# Allegro board 09-24.brd
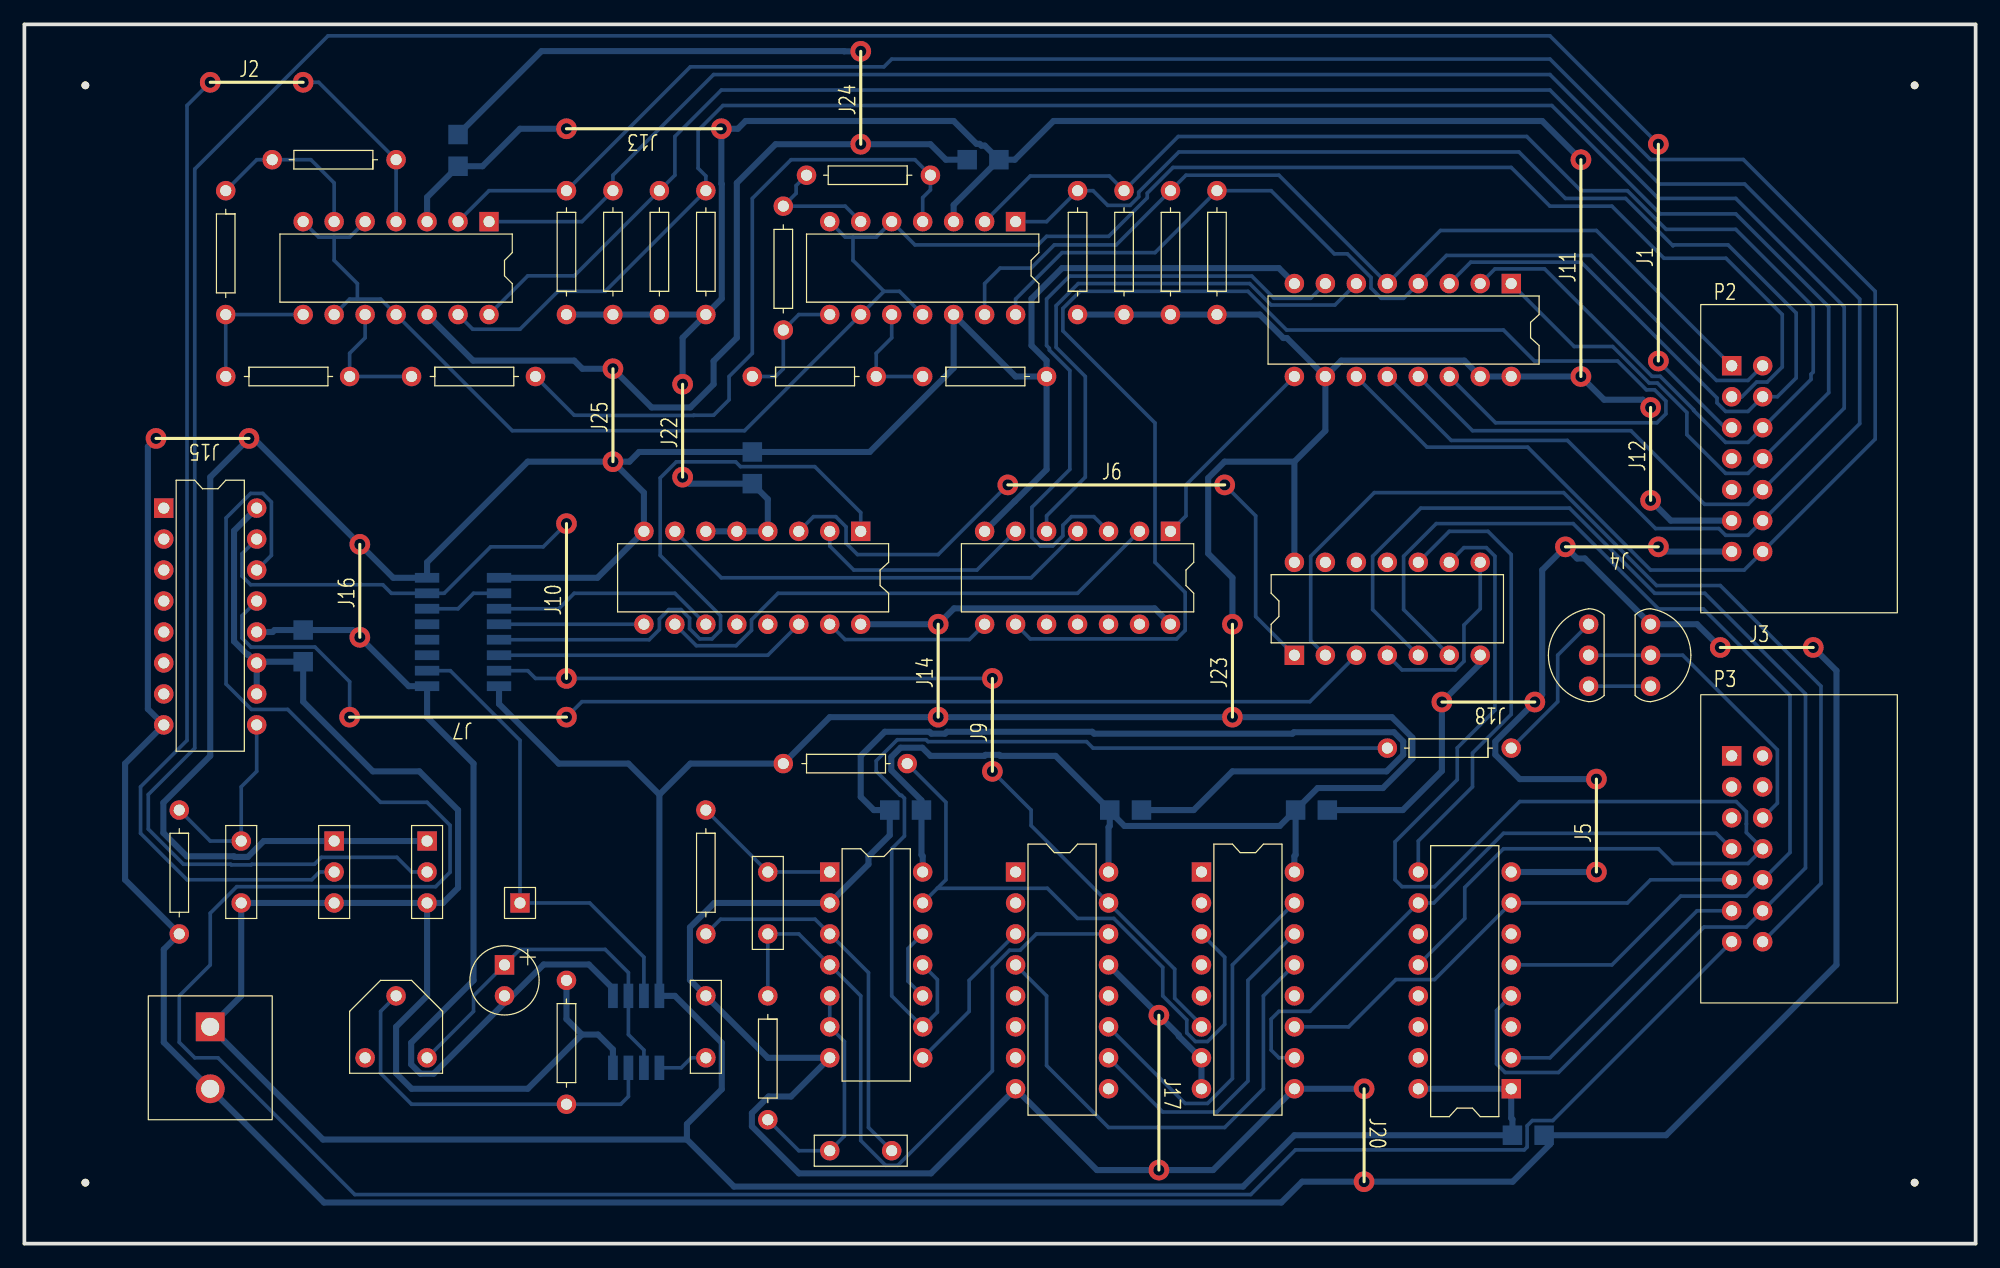
[diagram p0: board, top side]
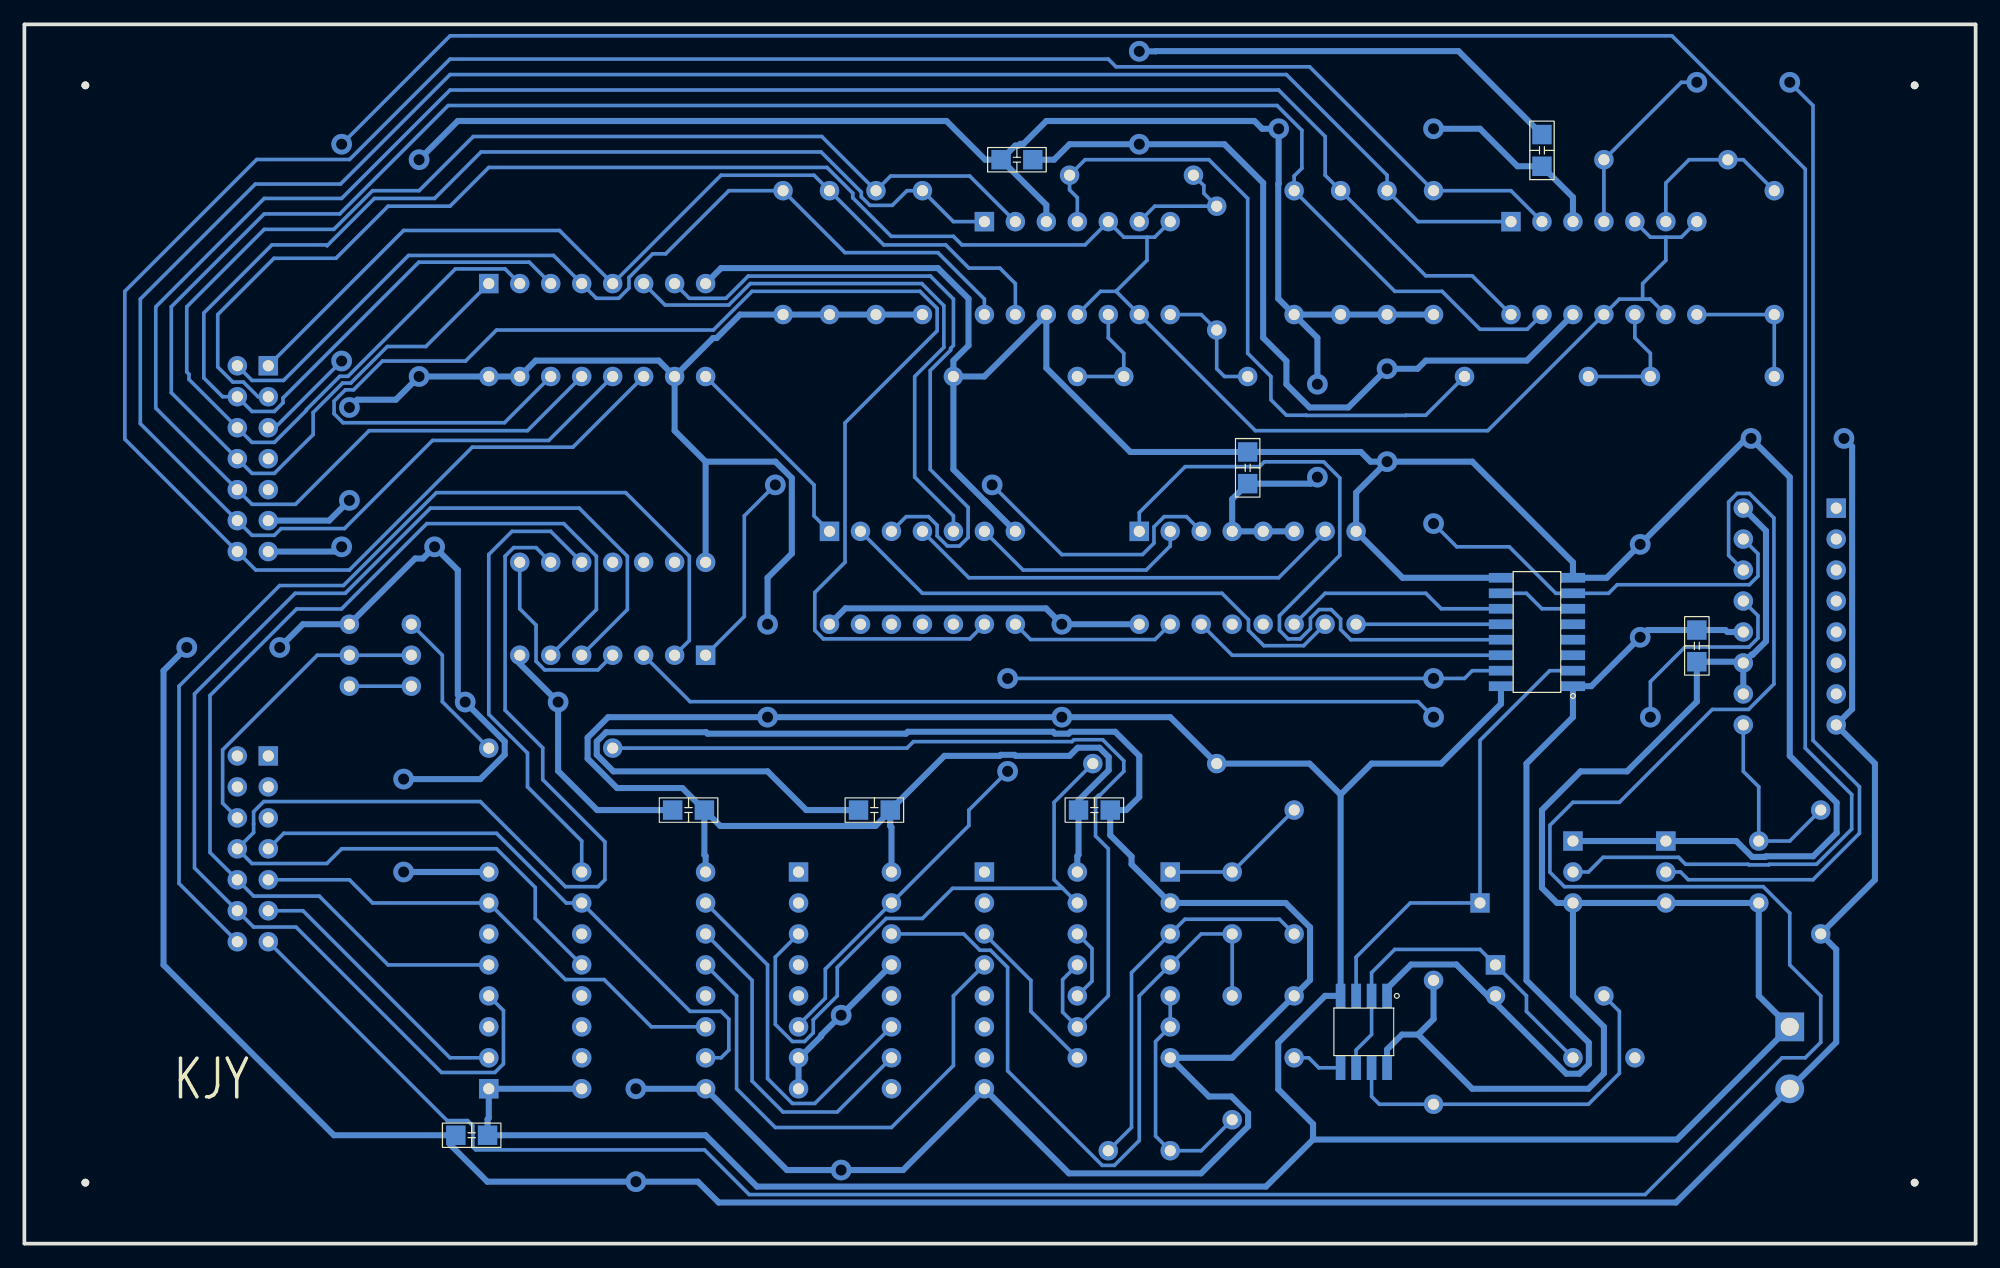
[diagram p1: board, bottom side, seen from below]

Outline 160 x 100 mm; copper layers: TOP, BOTTOM. Coordinates in mm from the lower left corner of the outline.
Outline path: 0,100 0,0 160,0 160,100 0,100

## Design rules (mm)
nets with their own width: min track width 0.5; nets +5V GND

## Placement (name value [footprint] x y rotation side)
C1  10uF  [CAP196]  39.37 22.86 0 top
C2  0.1uF  [CAP300]  55.88 15.24 90 top
C3  0.1uF  [CAP300]  17.78 27.94 90 top
C4  0.01uF  [CAP300]  60.96 30.48 270 top
C5  0.01uF  [CAP300]  71.12 7.62 180 top
C6  0.1uF  [SMDCAP]  35.56 88.27 90 bottom
C7  0.1uF  [SMDCAP]  80.01 88.9 180 bottom
C8  0.1uF  [SMDCAP]  59.69 62.23 90 bottom
C9  0.1uF  [SMDCAP]  22.86 47.62 90 bottom
C10  0.1uF  [SMDCAP]  73.66 35.56 180 bottom
C11  0.1uF  [SMDCAP]  88.9 35.56 0 bottom
C12  0.1uF  [SMDCAP]  104.14 35.56 0 bottom
C13  0.1uF  [SMDCAP]  121.92 8.89 0 bottom
J1  -  [JUMPER6]  133.99 72.39 270 bottom
J2  -  [JUMPER2]  15.24 95.25 180 bottom
J3  -  [JUMPER2]  139.06 48.9 180 bottom
J4  -  [JUMPER2]  133.99 57.15 0 bottom
J5  -  [JUMPER2]  128.91 30.48 270 bottom
J6  -  [JUMPER6]  80.64 62.23 180 bottom
J7  -  [JUMPER6]  44.45 43.18 0 bottom
J9  -  [JUMPER2]  79.38 38.73 270 bottom
J10  -  [JUMPER4]  44.45 46.35 270 bottom
J11  -  [JUMPER6]  127.64 71.12 270 bottom
J12  -  [JUMPER2]  133.35 60.96 270 bottom
J13  -  [JUMPER4]  57.15 91.44 0 bottom
J14  -  [JUMPER2]  74.93 43.18 270 bottom
J15  -  [JUMPER2]  18.41 66.04 0 bottom
J16  -  [JUMPER2]  27.5 49.73 270 bottom
J17  -  [JUMPER4]  93.03 18.73 90 bottom
J18  -  [JUMPER2]  123.86 44.42 0 bottom
J20  -  [JUMPER2]  109.86 12.7 90 bottom
J22  -  [JUMPER2]  53.98 62.87 270 bottom
J23  -  [JUMPER2]  99.06 43.18 270 bottom
J24  -  [JUMPER2]  68.58 90.17 270 bottom
J25  -  [JUMPER2]  48.26 64.14 270 bottom
NOREF  -  [unnamed]  5 95 0 top
NOREF#2  -  [unnamed]  155 5 0 top
NOREF#3  -  [unnamed]  155 95 0 top
NOREF#4  -  [unnamed]  5 5 0 top
NOREF#5  -  [#2]  0 0 0 top
NOREF#6  -  [#2]  0 0 90 top
P1  CON2  [POWER2]  15.24 17.78 270 top
P2  CON14  [JUMPER14]  140 72 270 top
P3  CON14  [JUMPER14]  140 40 270 top
Q1  2SC1815  [TO92]  128.27 45.72 90 top
Q2  2SC1815  [TO92]  133.35 50.8 270 top
R1  10K  [RES400]  44.45 21.59 180 top
R2  10K  [RES400]  30.48 88.9 90 top
R3  10K  [RES400]  16.51 86.36 180 top
R4  10K  [RES400]  16.51 71.12 270 top
R5  10K  [RES400]  31.75 71.12 270 top
R6  10K  [RES400]  74.3 87.63 90 top
R7  10K  [RES400]  62.23 85.09 180 top
R8  10K  [RES400]  59.69 71.12 270 top
R9  100  [RES400]  73.66 71.12 270 top
R10  4.7K  [RES400]  44.45 76.2 0 top
R11  4.7K  [RES400]  48.26 76.2 0 top
R12  4.7K  [RES400]  52.07 76.2 0 top
R13  4.7K  [RES400]  55.88 76.2 0 top
R14  4.7K  [RES400]  90.17 76.2 0 top
R15  4.7K  [RES400]  86.36 76.2 0 top
R16  4.7K  [RES400]  97.79 76.2 0 top
R17  4.7K  [RES400]  93.98 76.2 0 top
R18  680K  [RES400]  12.7 35.56 180 top
R19  10K  [RES400]  55.88 35.56 180 top
R20  10K  [RES400]  60.96 20.32 180 top
R21  10K  [RES400]  62.23 39.37 270 top
R22  1K  [RES400]  121.92 40.64 90 top
TP1  TP  [JUMPER1]  40.64 27.94 0 top
U1  NE555  [SOP8]  48.26 20.32 270 bottom
U2  LM339  [DIP14_3]  38.1 83.82 270 top
U3  LM339  [DIP14_3]  81.28 83.82 270 top
U4  40147  [DIP16_3]  121.92 78.74 270 top
U5  4069  [DIP14_3]  93.98 58.42 270 top
U6  4518  [SOP16]  33.02 45.72 0 bottom
U7  4585  [DIP16_3]  68.58 58.42 270 top
U8  4027  [DIP16_3]  11.43 60.33 0 top
U9  4071  [DIP14_3]  104.14 48.26 90 top
U10  4001  [DIP14_3]  66.04 30.48 0 top
U11  4017  [DIP16_3]  81.28 30.48 0 top
U12  4051  [DIP16_3]  96.52 30.48 0 top
U13  4175  [DIP16_3]  121.92 12.7 180 top
VR1  1M  [RESADJ]  33.02 15.24 270 top
VR2  10K  [JUMPER3]  25.4 33.02 270 top
VR3  10K  [JUMPER3]  33.02 33.02 270 top

## Library data of the parts
C1 = Cap Pol
C2-C5 = Cap NP: Tolerance: ***; User Part Number: ***
C6 = Cap TEXT_0
C7 = Cap TEXT_1
C8 = Cap TEXT_2
C9 = Cap TEXT_3
C10 = Cap TEXT_4
C11 = Cap TEXT_5
C12 = Cap TEXT_6
C13 = Cap TEXT_7
J1-J7 J9-J18 J20 J22-J25 = JUMPER
P1 = CON2
P2 P3 = CON14: User Part Number: ***
Q1 Q2 = 2SC1815
R1-R22 = resistor: Tolerance: ***; User Part Number: ***
TP1 = TP: User Part Number: ***
U1 = NE555
U2 U3 = LM339: Tolerance: ***; User Part Number: ***
U4 = 40147: Tolerance: ***; User Part Number: ***
U5 = 4069: Tolerance: ***; User Part Number: ***
U6 = 4518
U7 = 4585: Tolerance: ***; User Part Number: ***
U8 = 4027_0: Tolerance: ***; User Part Number: ***
U9 = 4071: Tolerance: ***; User Part Number: ***
U10 = 4001: Tolerance: ***; User Part Number: ***
U11 = 4017: Tolerance: ***; User Part Number: ***
U12 = 4051: Tolerance: ***; User Part Number: ***
U13 = 4175: Tolerance: ***; User Part Number: ***
VR1 = VR1: Tolerance: ***; User Part Number: ***
VR2 VR3 = VR2: User Part Number: ***

## Footprints (pads in the part's own frame, mm; a bottom-side part is the same pattern mirrored in y, then rotated)
CAP196
  rect 1.6x1.6 hole 0.914: 1(0,0)
  round 1.6 hole 0.91: 2(0,-2.54)
CAP300
  round 1.6 hole 0.91: 1(0,0) 2(5.08,0)
DIP14_3
  rect 1.6x1.6 hole 0.914: 1(0,0)
  round 1.6 hole 0.91: 2(0,-2.54) 3(0,-5.08) 4(0,-7.62) 5(0,-10.16) 6(0,-12.7) 7(0,-15.24) 8(7.62,-15.24) 9(7.62,-12.7) 10(7.62,-10.16) 11(7.62,-7.62) 12(7.62,-5.08) 13(7.62,-2.54) 14(7.62,0)
DIP16_3
  rect 1.6x1.6 hole 0.914: 1(0,0)
  round 1.6 hole 0.91: 2(0,-2.54) 3(0,-5.08) 4(0,-7.62) 5(0,-10.16) 6(0,-12.7) 7(0,-15.24) 8(0,-17.78) 9(7.62,-17.78) 10(7.62,-15.24) 11(7.62,-12.7) 12(7.62,-10.16) 13(7.62,-7.62) 14(7.62,-5.08) 15(7.62,-2.54) 16(7.62,0)
JUMPER1
  rect 1.6x1.6 hole 0.914: 1(0,0)
JUMPER3
  rect 1.6x1.6 hole 0.914: 1(0,0)
  round 1.6 hole 0.91: 2(2.54,0) 3(5.08,0)
JUMPER14
  rect 1.6x1.6 hole 0.914: 1(0,0)
  round 1.6 hole 0.91: 2(0,2.54) 3(2.54,0) 4(2.54,2.54) 5(5.08,0) 6(5.08,2.54) 7(7.62,0) 8(7.62,2.54) 9(10.16,0) 10(10.16,2.54) 11(12.7,0) 12(12.7,2.54) 13(15.24,0) 14(15.24,2.54)
POWER2
  rect 2.362x2.362 hole 1.473: 1(0,0)
  round 2.362 hole 1.473: 2(5.08,0)
RES400
  round 1.6 hole 0.91: 1(0,0) 2(0,10.16)
RESADJ
  round 1.6 hole 0.91: 1(0,0) 2(-5.08,-2.54) 3(0,-5.08)
SMDCAP
  rect 1.6x1.6 smd: 1(0.1,0) 2(2.7,0)
SOP8
  rect 2x0.8 smd: 1(0,0) 2(0,-1.27) 3(0,-2.54) 4(0,-3.81) 5(5.9,-3.81) 6(5.9,-2.54) 7(5.9,-1.27) 8(5.9,0)
SOP16
  rect 2x0.8 smd: 1(0,0) 2(0,-1.27) 3(0,-2.54) 4(0,-3.81) 5(0,-5.08) 6(0,-6.35) 7(0,-7.62) 8(0,-8.89) 9(5.9,-8.89) 10(5.9,-7.62) 11(5.9,-6.35) 12(5.9,-5.08) 13(5.9,-3.81) 14(5.9,-2.54) 15(5.9,-1.27) 16(5.9,0)
TO92
  round 1.6 hole 0.91: 1(0,0) 2(2.54,0) 3(5.08,0)
unnamed
  round 0.635 hole 3 unplated: (0,0)

## Nets
+5V: C3.1 C6.1 C7.1 C8.1 C9.1 C10.1 C11.1 C12.1 C13.1 P1.1 P2.11 R1.1 R10.1 R11.1 R12.1 R13.1 R14.1 R15.1 R16.1 R17.1 R21.1 U1.4(RST) U1.8(VCC) U2.3 U3.3 U4.10(I\9\) U4.15(I\0\) U4.16(VCC) U5.14 U6.16 U7.4(A>BIN) U7.5(A<BIN) U7.6(A=BIN) U7.16(VCC) U8.10(J) U8.11(K) U8.16 U9.14 U10.14 U11.16(VCC) U12.16(VCC) U13.1(R\S\T\) U13.16(VCC) VR2.3(A) VR3.3(A)
GND: C1.2 C2.2 C6.2 C7.2 C8.2 C9.2 C10.2 C11.2 C12.2 C13.2 P1.2 P2.13 Q2.1(B) R9.2 R18.2 U1.1(GND) U2.12 U3.12 U4.8(GND) U5.7 U6.1(CLK) U6.8 U6.9(CLK) U7.8(GND) U8.8 U8.12(RST) U9.7 U10.2(I1) U10.7 U11.8(GND) U11.13(C\K\E\N\) U12.7(VEE) U12.8(GND) U12.9(C) U13.8(GND) VR2.1(WIPER) VR3.1(WIPER)
AD0: P2.14 R10.2 U2.2(OUT) U4.11(I\1\)
AD1: P2.12 R11.2 U2.1(OUT) U4.12(I\2\)
AD2: P2.10 R12.2 U2.14(OUT) U4.13(I\3\)
AD3: P2.8 R13.2 U2.13(OUT) U4.1(I\4\)
AD4: P2.6 R14.2 U3.2(OUT) U4.2(I\5\)
AD5: P2.4 R15.2 U3.1(OUT) U4.3(I\6\)
AD6: P2.2 R16.2 U3.14(OUT) U4.4(I\7\)
AD7: P2.1 R17.2 U3.13(OUT) U4.5(I\8\)
CLK: TP1.1 U1.3(OUT) U6.2(EN)
MOTOR-GND: P3.6 Q1.2(C) Q2.2(C)
MR: U6.7(CLR) U6.15(CLR) U8.15(Q) U11.15(RST) U12.6(E\N\)
MR2: P3.13 U8.14(Q\)
SW1: P3.14 U9.2(I1)
SW2: P3.12 U9.5(I0) U13.4(D0)
SW3: P3.10 U9.6(I1) U13.5(D1)
SW4: P3.8 U9.9(I1) U13.12(D2)
SWLED1: P3.11 U13.2(Q0)
SWLED2: P3.9 U12.11(A) U13.7(Q1)
SWLED3: P3.7 U12.10(B) U13.10(Q2)
VR3: P2.5 VR3.2(B)
VR-LED: P2.3 U2.5(+IN) U2.7(+IN) U2.9(+IN) U2.11(+IN) U3.5(+IN) U3.7(+IN) U3.9(+IN) U3.11(+IN)
N01111: R2.2 R3.1 U2.6(-IN)
N01115: R2.1 U2.4(-IN) VR2.2(B)
N01154: R3.2 R4.1 U2.8(-IN)
N01241: R4.2 R5.1 U2.10(-IN)
N01315: R5.2 R6.1 U3.4(-IN)
N01389: R6.2 R7.1 U3.6(-IN)
N01463: R7.2 R8.1 U3.8(-IN)
N01537: R8.2 R9.1 U3.10(-IN)
N03199: U4.9(A\) U5.1(I)
N03203: U4.7(B\) U5.3(I)
N03218: U4.6(C\) U5.5(I)
N03230: U4.14(D\) U5.9(I)
N03242: U5.8(O) U7.15(A3)
N03249: U5.6(O) U7.2(A2)
N03261: U5.4(O) U7.7(A1)
N03273: U5.2(O) U7.10(A0)
N03297: U6.11(Q0) U7.11(B0)
N03299: U6.12(Q1) U7.9(B1)
N03301: U6.13(Q2) U7.1(B2)
N03303: U6.14(Q3) U7.14(B3)
N03321: U6.6(Q3) U6.10(EN)
N03552: C3.2 R18.1 U8.9(SET)
N03574: U7.3(A=BOUT) U9.1(I0)
N03611: R1.2 U1.7(DISC) VR1.2
N03615: C1.1 U1.2(TRIG) U1.6(THR) VR1.1
N03657: C2.1 U1.5(CV)
N03771: U8.13(CLK) U9.3(O)
N13764: C5.1 R19.2 U10.3(O)
N13778: C5.2 R20.2 U10.5(I0) U10.6(I1)
N13892: C4.1 R19.1 U10.1(I0)
N13899: C4.2 R20.1 U10.4(O) U11.14(CLK)
N14066: U9.4(O) U9.8(I0)
N14070: U9.10(O) U13.9(CLK)
N14098: U10.8(I0) U11.3(0)
N14122: U11.4(2) U12.13(X0)
N14134: U11.10(4) U12.14(X1)
N14146: U11.11(9) U12.15(X2)
N14213: R21.2 U10.13(I1) U12.3(X)
N14272: U10.10(O) U10.12(I0)
N14287: R22.2 U10.9(I1) U10.11(O)
N14409: Q1.3(E) R22.1
N14422: Q1.1(B) Q2.3(E)

Pads without a net: P2 7 9; P3 1 2 3 4 5; U5 10 11 12 13; U6 3 4 5; U7 12 13; U8 1 2 3 4 5 6 7; U9 11 12 13; U11 1 2 5 6 7 9 12; U12 1 2 4 5 12; U13 3 6 11 13 14 15; VR1 3

## Via types
v1: diameter 1.7, hole 0.91, TOP to BOTTOM, 44 vias

## Routing (per net, layer and track width the routed paths; a pad name or vN(x,y) marks a point on that pad's centre or on a via; arc(x,y) is an arc through that point)
+5V: length 697.5
  BOTTOM w0.5: R15.1 R14.1 R17.1 R16.1 101.31,76.2 103.23,74.28 103.52,74.28 U4.10 ; 45.72,17.14 44.45,18.41 R1.1 ; 45.72,17.14 47.04,17.14 48.26,15.92 U1.8 ; 45.72,17.14 41.27,12.7 31.75,12.7 30.48,13.97 30.48,17.78 33.02,20.32 VR3.3 ; C12.1 106.05,37.37 111.4,37.37 113.82,39.79 113.82,41.49 112.13,43.18 v1(99.06,43.18) v1(74.93,43.18) 66.04,43.18 R21.1 54.61,39.37 52.07,36.83 ; C12.1 104.24,31.88 104.14,31.78 U12.16 ; C12.1 102.94,34.26 90.2,34.26 89,35.46 ; U3.3 76.2,85.19 C7.1 ; 89,35.46 C11.1 84.56,40.01 80.02,40.01 79.94,40.09 78.81,40.09 78.73,40.01 74.3,40.01 73.63,40.67 71.85,40.67 71.09,39.91 71.09,38.83 73.56,36.35 C10.1 73.56,31.88 73.66,31.78 U10.14 ; 89,35.46 89,34.26 88.9,34.16 U11.16 ; U8.16 17.19,58.47 17.19,49.4 18.28,48.31 18.37,48.31 18.95,47.73 ; R13.1 57.18,77.5 57.18,86.9 57.15,86.94 v1(57.15,91.44) 58.5,91.44 59.14,92.08 76.2,92.08 78.07,90.2 78.32,90.2 78.47,90.06 78.75,90.06 C7.1 ; R13.1 R12.1 R11.1 R10.1 ; R13.1 53.98,74.3 v1(53.98,70.48) ; 52.07,36.83 49.53,39.37 43.81,39.37 38.92,44.27 U6.16 ; 52.07,36.83 U1.4 53.34,20.32 57.18,16.48 57.18,12.66 54.33,9.81 54.33,8.54 ; v1(133.35,68.58) 132.72,69.22 129.54,69.22 v1(127.64,71.12) U4.16 U4.15 118.08,72.42 107.98,72.42 U4.10 ; U2.3 33.02,85.83 C6.1 37.56,88.36 40.64,91.44 v1(44.45,91.44) ; 54.33,8.54 58.19,4.68 99.93,4.68 104.14,8.89 C13.1 122.02,10.19 121.92,10.29 U13.1 U13.16 ; 54.33,8.54 24.48,8.54 P1.1 17.78,20.32 C3.1 VR2.3 VR3.3 ; v1(53.98,62.87) 54.51,62.33 C8.1 60.96,61.06 U7.4 U7.5 U7.6 ; U7.16 v1(74.93,50.8) 76.23,52.1 92.68,52.1 U5.14 ; v1(127.64,88.9) 124.46,92.08 84.39,92.08 81.21,88.9 C7.1 ; VR3.3 34.32,27.94 35.56,29.18 35.56,35.56 32.39,38.73 28.58,38.73 22.86,44.45 C9.1 18.95,47.73 ; U4.10 106.68,66.67 104.14,64.14 ; 18.95,47.73 U8.11 U8.10 ; 104.14,64.14 U9.14 ; 104.14,64.14 98.42,64.14 97.07,62.79 97.07,56.6 99.06,54.61 v1(99.06,50.8) ; v1(133.35,60.96) 135.01,59.3 P2.11
GND: length 893.9
  BOTTOM w0.5: 19.05,50.16 20.35,50.16 20.51,50.33 C9.2 26.91,50.33 v1(27.5,49.73) 31.52,45.72 U6.1 33.02,43.18 36.83,39.37 36.83,21.59 31.72,16.48 31.72,14.7 32.48,13.94 33.56,13.94 39.37,19.75 C1.2 40.01,20.32 42.58,22.89 46.29,22.89 48.26,20.92 U1.1 ; U12.8 U12.7 96.43,15.24 94.66,17.01 94.66,17.1 v1(93.03,18.73) U11.13 ; v1(146.69,48.9) 148.59,46.99 148.59,22.86 134.62,8.89 C13.2 125.09,8.41 125.09,8.14 122.04,5.08 v1(109.86,5.08) 104.78,5.08 103.07,3.37 24.57,3.37 P1.2 11.43,16.51 11.43,24.13 R18.2 8.26,29.84 8.26,39.37 U8.8 10.13,43.85 10.13,65.37 v1(10.79,66.04) ; C12.2 113.03,35.56 116.23,38.77 v1(116.23,44.42) 119.38,47.56 U9.7 ; v1(109.86,12.7) U12.9 97.47,6.03 v1(93.03,6.03) 87.95,6.03 U11.8 74.34,5.76 63.51,5.76 59.66,9.62 59.66,10.7 61.02,12.06 62.87,12.06 U10.7 60.96,15.24 C2.2 54.58,21.62 54.58,25.94 56.58,27.94 U10.2 69.22,31.11 69.22,31.75 70.96,33.5 C10.2 69.66,35.56 68.58,36.64 68.58,40.01 70.56,41.98 74.21,41.98 74.37,41.83 75.49,41.83 75.65,41.98 87.56,41.98 87.71,41.83 103.98,41.83 104.1,41.94 112.3,41.94 113.06,41.18 113.06,40.1 111.7,38.73 99.06,38.73 95.89,35.56 C11.2 ; v1(48.26,64.14) 49.61,64.14 50.41,64.93 C8.2 69.31,64.93 76.2,71.81 U3.12 81.28,71.12 R9.2 ; v1(48.26,64.14) 41.27,64.14 33.02,55.88 U6.8 30.25,54.61 v1(27.5,57.35) 18.82,66.04 v1(18.41,66.04) 15.24,62.87 15.24,40.01 11.4,36.16 11.4,33.69 13.32,31.77 17.19,31.77 17.24,31.72 18.32,31.72 19.62,33.02 VR2.1 VR3.1 ; v1(48.26,64.14) 50.8,61.59 U7.8 46.99,54.61 U6.9 ; U4.8 102.87,80.01 85.09,80.01 82.58,77.5 82.58,73.66 83.82,72.42 R9.2 ; v1(133.99,57.15) 134.38,56.76 P2.13 ; U5.7 81.2,60.88 81.21,60.88 83.82,63.49 R9.2 ; C6.2 42.4,97.81 67.21,97.81 67.23,97.79 v1(68.58,97.79) ; U2.12 36.8,72.42 45.09,72.42 45.75,71.75 v1(48.26,71.75) 51.44,68.58 54.61,68.58 56.52,70.48 56.52,72.39 58.42,74.3 58.42,87 61.59,90.17 v1(68.58,90.17) 74.3,90.17 75.56,88.9 C7.2 ; v1(128.91,38.1) 122.61,38.1 120.62,40.1 120.62,41.18 v1(123.86,44.42) 124.46,45.02 124.46,55.24 v1(126.36,57.15) 127.32,56.19 127.96,56.19 Q2.1 137.16,50.8 v1(139.06,48.9) ; U13.8 v1(128.91,30.48)
AD0: length 195.3
  BOTTOM w0.3: U2.2 38.1,86.36 R10.2 54.61,96.52 70.48,96.52 71.12,97.16 125.1,97.16 133.34,88.92 140.95,88.92 151.76,78.1 151.76,65.98 P2.14 141.03,55.24 133.35,55.24 123.27,65.32 115.02,65.32 U4.11
AD1: length 183.9
  BOTTOM w0.3: U4.12 117,65.88 126.53,65.88 133.76,58.65 138.95,58.65 139.5,58.1 141.34,58.1 P2.12 150.5,67.25 150.5,77.47 141.06,86.9 134.07,86.9 125.09,95.89 56.52,95.89 48.26,87.63 R11.2 45.72,83.82 U2.1
AD2: length 178.8
  BOTTOM w0.3: U4.13 118.75,66.67 131.74,66.67 137.77,60.64 141.34,60.64 P2.10 149.22,68.53 149.22,76.83 140.34,85.72 133.99,85.72 125.1,94.61 57.15,94.61 53.34,90.8 53.34,87.63 R12.2 45.09,79.38 41.27,79.38 U2.14
AD3: length 174.5
  BOTTOM w0.3: U4.1 127.08,73.58 130.24,73.58 133.24,70.58 133.91,70.58 136.32,68.17 136.32,66.35 139.5,63.18 141.34,63.18 P2.8 147.96,69.8 147.96,76.83 140.34,84.45 134.14,84.45 125.25,93.34 57.28,93.34 55.24,91.31 55.24,88.2 55.88,87.56 R13.2 47.62,78.11 43.75,78.11 40.64,75 36.76,75 U2.13
AD4: length 119.3
  BOTTOM w0.3: U3.2 82.48,87.56 88.97,87.56 R14.2 94.61,90.81 123.19,90.81 127.64,86.36 131.45,86.36 134.62,83.19 140.33,83.19 146.69,76.83 146.69,71.49 146.5,71.31 146.5,70.88 P2.6 141.34,65.72 139.5,65.72 136.88,68.34 136.88,68.39 134.14,71.14 133.47,71.14 124.66,79.94 120.58,79.94 U4.2
AD5: length 114.1
  BOTTOM w0.3: U4.3 118.6,80.5 127.65,80.5 138.8,69.35 138.8,68.96 139.5,68.26 141.34,68.26 P2.4 143.74,69.46 145.28,71 145.28,76.33 139.7,81.92 135.25,81.92 135.18,81.84 131.3,85.72 126.36,85.72 122.55,89.53 94.67,89.53 91.37,86.24 91.37,85.86 90.67,85.16 88.83,85.16 87.63,86.36 R15.2 83.82,83.82 U3.1
AD6: length 76.6
  BOTTOM w0.3: U3.14 81.28,77.47 85.09,81.28 92.71,81.28 R16.2 102.23,86.36 107.42,81.18 108.48,81.18 110.42,79.24 110.42,78.37 111.26,77.54 113.1,77.54 U4.4 116.61,81.05 128.5,81.05 138.75,70.8 141.34,70.8 P2.2
AD7: length 77.6
  BOTTOM w0.3: P2.1 128.91,83.09 116.11,83.09 U4.5 102.87,87.63 95.25,87.63 R17.2 89.53,81.92 84.45,81.92 82.55,80.01 80.01,80.01 78.74,78.74 U3.13
CLK: length 38.5
  BOTTOM w0.3: U1.3 50.8,23.5 46.35,27.94 TP1.1 40.64,41.27 34.92,46.99 U6.2
MOTOR-GND: length 24.8
  BOTTOM w0.3: P3.6 143.74,36.12 143.74,40.5 135.98,48.26 Q2.2 Q1.2
MR: length 101.9
  BOTTOM w0.3: v1(79.38,46.35) v1(44.45,46.35) 41.91,46.35 41.27,46.99 U6.15 ; v1(44.45,59.05) 42.55,57.15 38.23,57.15 34.42,53.34 U6.7 30.09,53.34 29.39,54.04 18.55,54.04 17.85,54.75 17.85,56.58 19.05,57.78 ; U12.6 96.06,18.24 96.06,18.39 94.33,20.12 94.33,22.52 U11.15 82.55,34.29 82.55,35.56 v1(79.38,38.73)
MR2: length 226.3
  BOTTOM w0.3: P3.13 125.33,10.09 123.65,10.09 123.22,9.67 123.22,7.92 122.99,7.69 104.22,7.69 100.56,4.03 27.09,4.03 15.88,15.24 13.97,15.24 12.7,16.51 12.7,20.32 15.24,22.86 15.24,27.1 17.41,29.28 33.72,29.28 34.91,30.46 34.91,34.31 33.02,36.2 29.21,36.2 21.59,43.81 18.62,43.81 16.54,45.89 16.54,59.52 18.55,61.53 19.55,61.53 20.25,60.82 20.25,56.45 19.05,55.24
SW1: length 82.1
  BOTTOM w0.3: U9.2 105.48,49.46 105.48,56.38 110.69,61.59 126.22,61.59 133.84,53.98 139.06,53.98 147.32,45.72 147.32,29.54 P3.14
SW2: length 106
  BOTTOM w0.3: U13.4 120.72,19.12 120.72,14.74 121.42,14.04 125.8,14.04 137.72,25.96 141.2,25.96 P3.12 146.05,30.81 146.05,45.08 137.79,53.34 133.69,53.34 126.7,60.33 114.5,60.33 110.56,56.38 110.56,52 U9.5
SW3: length 87.9
  BOTTOM w0.3: U13.5 130.18,22.86 135.82,28.5 141.2,28.5 P3.10 144.78,32.08 144.78,44.95 137.68,52.05 134,52.05 127,59.05 115.77,59.05 113.1,56.38 113.1,52 U9.6
SW4: length 105
  BOTTOM w0.3: U9.9 118.04,57.08 119.88,57.08 120.58,56.38 120.58,43.75 117.5,40.66 117.5,38.05 112.39,32.95 112.39,29.84 112.96,29.28 115.64,29.28 122.61,36.26 140.37,36.26 141.2,35.42 141.2,34.42 141.2,33.72 P3.8 141.34,31.18 135.19,31.18 133.99,32.38 121.28,32.38 118.11,29.21 118.11,26.67 U13.12
SWLED1: length 23.1
  BOTTOM w0.3: P3.11 137.16,27.3 125.09,15.24 U13.2
SWLED2: length 40.9
  BOTTOM w0.3: U12.11 108.58,17.78 112.46,21.66 115.64,21.66 U13.7 131.44,27.94 133.34,29.84 P3.9
SWLED3: length 49.3
  BOTTOM w0.3: P3.7 138.72,33.66 121.28,33.66 115.57,27.94 U13.10 105.41,19.05 102.87,19.05 102.23,18.41 102.23,15.88 102.87,15.24 U12.10
VR3: length 217
  BOTTOM w0.3: P2.5 139.46,66.92 v1(133.99,72.39) ; v1(133.99,90.17) 125.09,99.06 24.9,99.06 13.97,88.13 13.97,40.64 10.16,36.83 10.16,34 13.04,31.11 16.91,31.11 16.97,31.06 18.59,31.06 18.64,31.11 23.79,31.11 24.35,31.68 30.55,31.68 31.75,30.48 VR3.2
VR-LED: length 173.5
  BOTTOM w0.3: U3.11 71.75,78.11 70.48,78.11 ; 67.94,82.55 67.31,82.55 U3.7 ; 67.94,82.55 69.85,82.55 U3.5 73.03,81.92 83.12,81.92 83.82,82.62 88.91,82.62 92.08,85.78 92.08,86.16 94.18,88.27 121.92,88.27 125.09,85.09 130.18,85.09 134.45,80.82 139.53,80.82 144.15,76.2 144.15,71.9 142.91,70.66 142.04,70.66 140.84,69.46 P2.3 ; 67.94,82.55 67.94,80.64 70.48,78.11 ; U2.7 24.13,82.55 25.4,82.55 ; U2.9 26.67,77.47 27.3,77.47 ; 27.3,77.47 27.3,78.74 25.4,80.64 25.4,82.55 ; 27.3,77.47 29.21,77.47 U2.11 40.01,66.67 59.05,66.67 U3.9 70.48,78.11 ; 25.4,82.55 26.67,82.55 U2.5
N01111: length 13.9
  BOTTOM w0.3: R3.1 19.05,88.9 R2.2 23.5,88.9 25.4,87 U2.6
N01115: length 97
  BOTTOM w0.3: v1(15.24,95.25) 13.34,93.34 13.34,41.27 9.53,37.47 9.53,33.66 13.34,29.84 23.56,29.84 24.2,30.48 VR2.2 ; U2.4 R2.1 24.13,95.25 v1(22.86,95.25)
N01154: length 11.4
  BOTTOM w0.3: R4.1 R3.2 U2.8
N01241: length 10.7
  BOTTOM w0.3: R5.1 R4.2 26.67,73.03 27.94,74.3 U2.10
N01315: length 55.6
  BOTTOM w0.3: R5.2 45.09,67.94 46.7,67.94 46.72,67.93 54.88,67.93 54.9,67.94 56.52,67.94 57.78,69.21 57.78,71.12 59.69,73.03 59.69,85.72 62.87,88.9 73.03,88.9 R6.1 74.3,86.43 73.66,85.79 U3.4
N01389: length 10.2
  BOTTOM w0.3: R6.2 63.28,86.78 63.28,86.14 R7.1 67.31,85.09 U3.6
N01463: length 10.3
  BOTTOM w0.3: U3.8 63.5,76.2 R7.2 62.23,71.75 61.59,71.12 R8.1
N01537: length 9.4
  BOTTOM w0.3: U3.10 71.12,74.3 69.85,73.03 R8.2 R9.1
N03199: length 16.9
  BOTTOM w0.3: U5.1 95.25,59.69 95.25,62.23 U4.9
N03203: length 55.1
  BOTTOM w0.3: U5.3 87.7,59.62 85.86,59.62 85.16,58.92 85.16,58.05 84.32,57.22 83.32,57.22 82.62,57.92 82.62,60.39 85.72,63.5 85.72,71.61 84.05,73.28 84.05,73.43 83.82,73.66 83.82,77.47 85.7,79.36 100.65,79.36 102.47,77.54 105.48,77.54 U4.7
N03218: length 47.6
  BOTTOM w0.3: U4.6 107.46,76.98 102.24,76.98 100.48,78.74 86.41,78.74 84.6,76.93 84.6,73.51 87,71.12 87,62.87 83.82,59.69 U5.5
N03230: length 119.7
  BOTTOM w0.3: U5.9 82.48,49.6 94.48,49.6 95.18,50.3 95.18,53.41 92.71,55.88 92.71,67.31 85.16,74.86 85.16,76.7 86.56,78.11 100.33,78.11 103.5,74.93 121.28,74.93 123.83,72.39 130.64,72.39 133,70.03 133.68,70.03 134.6,69.1 134.6,68.06 133.87,67.33 120.63,67.33 U4.14
N03242: length 13.7
  BOTTOM w0.3: U5.8 77.49,49.55 67.29,49.55 U7.15
N03249: length 18.6
  BOTTOM w0.3: U7.2 66.04,57.22 68.01,55.24 78.11,55.24 U5.6
N03261: length 36.2
  BOTTOM w0.3: U7.7 57.15,54.61 82.55,54.61 U5.4
N03273: length 43.2
  BOTTOM w0.3: U5.2 86.36,53.34 61.8,53.34 59.62,51.17 59.62,50.3 58.37,49.04 55.1,49.04 U7.10
N03297: length 18.5
  BOTTOM w0.3: U6.11 43.82,52.07 45.09,53.34 53.34,53.34 U7.11
N03299: length 11.9
  BOTTOM w0.3: U6.12 U7.9
N03301: length 56.3
  BOTTOM w0.3: U7.1 68.58,59.96 64.81,63.73 58.72,63.73 58.33,64.12 53.45,64.12 52.14,62.8 52.14,56.45 57.08,51.5 57.08,50.3 56.38,49.6 55.38,49.6 54.54,50.43 54.54,51.3 53.84,52 52.84,52 52.07,51.23 52.07,50.37 51.23,49.53 U6.13
N03303: length 25.6
  BOTTOM w0.3: U6.14 60.96,48.26 U7.14
N03321: length 6.4
  BOTTOM w0.3: U6.6 35.56,52.07 36.83,53.34 U6.10
N03552: length 16.2
  BOTTOM w0.3: U8.9 19.05,38.73 17.78,37.47 C3.2 15.24,33.02 R18.1
N03574: length 38.4
  BOTTOM w0.3: U7.3 64.7,59.62 66.54,59.62 67.38,58.79 67.38,57.45 68.31,56.52 74.93,56.52 v1(80.64,62.23) ; U9.1 100.97,51.44 100.97,59.69 v1(98.42,62.23)
N03611: length 30.9
  BOTTOM w0.3: U1.7 49.53,12.06 48.9,11.43 R1.2 31.75,11.43 29.21,13.97 29.21,19.05 VR1.2
N03615: length 30.1
  BOTTOM w0.3: VR1.1 36.83,19.05 36.83,20.32 C1.1 40.64,24.13 47.62,24.13 49.53,22.23 U1.2 49.53,17.14 50.8,15.88 U1.6
N03657: length 4.1
  BOTTOM w0.3: U1.5 53.86,14.42 54.68,15.24 C2.1
N03771: length 83.6
  BOTTOM w0.3: 19.05,52.7 17.85,51.5 17.85,49.67 18.58,48.93 23.83,48.93 26.67,46.09 v1(26.67,43.18) ; v1(44.45,43.18) 45.72,44.45 105.41,44.45 U9.3
N13764: length 31
  BOTTOM w0.3: C5.1 69.22,9.53 69.22,22.23 U10.3 64.84,26.6 57.08,26.6 R19.2
N13778: length 19.8
  BOTTOM w0.3: R20.2 63.5,7.62 C5.2 67.24,8.82 67.24,16.58 U10.6 U10.5
N13892: length 12.3
  BOTTOM w0.3: R19.1 C4.1 U10.1
N13899: length 60.7
  BOTTOM w0.3: U11.14 82.98,25.4 81.65,24.06 80.78,24.06 79.38,22.66 79.38,14.17 71.62,6.42 70.62,6.42 68.58,8.46 68.58,20.32 U10.4 63.5,25.4 C4.2 R20.1
N14066: length 15.7
  BOTTOM w0.3: U9.8 119.38,52.07 118.04,50.73 118.04,47.76 117.34,47.06 112.96,47.06 U9.4
N14070: length 38.7
  BOTTOM w0.3: U9.10 116.84,58.42 120.02,58.42 121.92,56.52 121.92,43.41 118.75,40.23 118.75,37.47 114.3,33.02 U13.9
N14098: length 13.3
  BOTTOM w0.3: U10.8 77.47,19.05 77.47,21.59 U11.3
N14122: length 41.7
  BOTTOM w0.3: U11.4 83.82,20.32 83.82,14.61 88.9,9.53 98.42,9.53 101.6,12.7 101.6,20.32 U12.13
N14134: length 28
  BOTTOM w0.3: U11.10 93.34,10.79 97.79,10.79 100.33,13.34 100.33,21.59 U12.14
N14146: length 30.1
  BOTTOM w0.3: U11.11 95.18,11.5 97.02,11.5 99.06,13.54 99.06,22.86 U12.15
N14213: length 53.1
  BOTTOM w0.3: U12.3 98.42,23.5 98.42,17.98 97.02,16.58 96.02,16.58 95.32,17.28 95.32,18.35 93.34,20.32 93.34,22.66 89.33,26.67 86.36,26.67 83.89,29.14 74.86,29.14 ; 74.86,29.14 U10.13 ; 74.86,29.14 75.56,29.84 75.56,36.2 R21.2
N14272: length 6.1
  BOTTOM w0.3: U10.12 72.46,24.2 72.46,21.52 U10.10
N14287: length 73.3
  BOTTOM w0.3: R22.2 87.63,40.64 87.1,41.17 74.1,41.17 73.94,41.33 71.58,41.33 69.85,39.6 69.85,38.74 71.82,36.76 71.93,36.76 72.16,36.53 72.16,33.43 71.12,32.38 71.12,20.32 U10.9 74.86,18.98 74.86,21.66 U10.11
N14409: length 12.8
  BOTTOM w0.3: R22.1 125.73,44.45 125.73,48.26 Q1.3
N14422: length 5.1
  BOTTOM w0.3: Q2.3 Q1.1

## Text on the board
Ref Des/Silkscreen Bottom: KJY
PLACE_BOUND_TOP: FIGURE | SIZE | 0.91 | 0.914 | 1.473 | 3.0 | DRILL CHART: TOP to BOTTOM | ALL UNITS ARE IN MILLIMETERS | PLATED | NON-PLATED | QTY | 45 | 246 | 17 | 1 | 4
